# EAGLE board SoilCape (EAGLE 7.2.0)
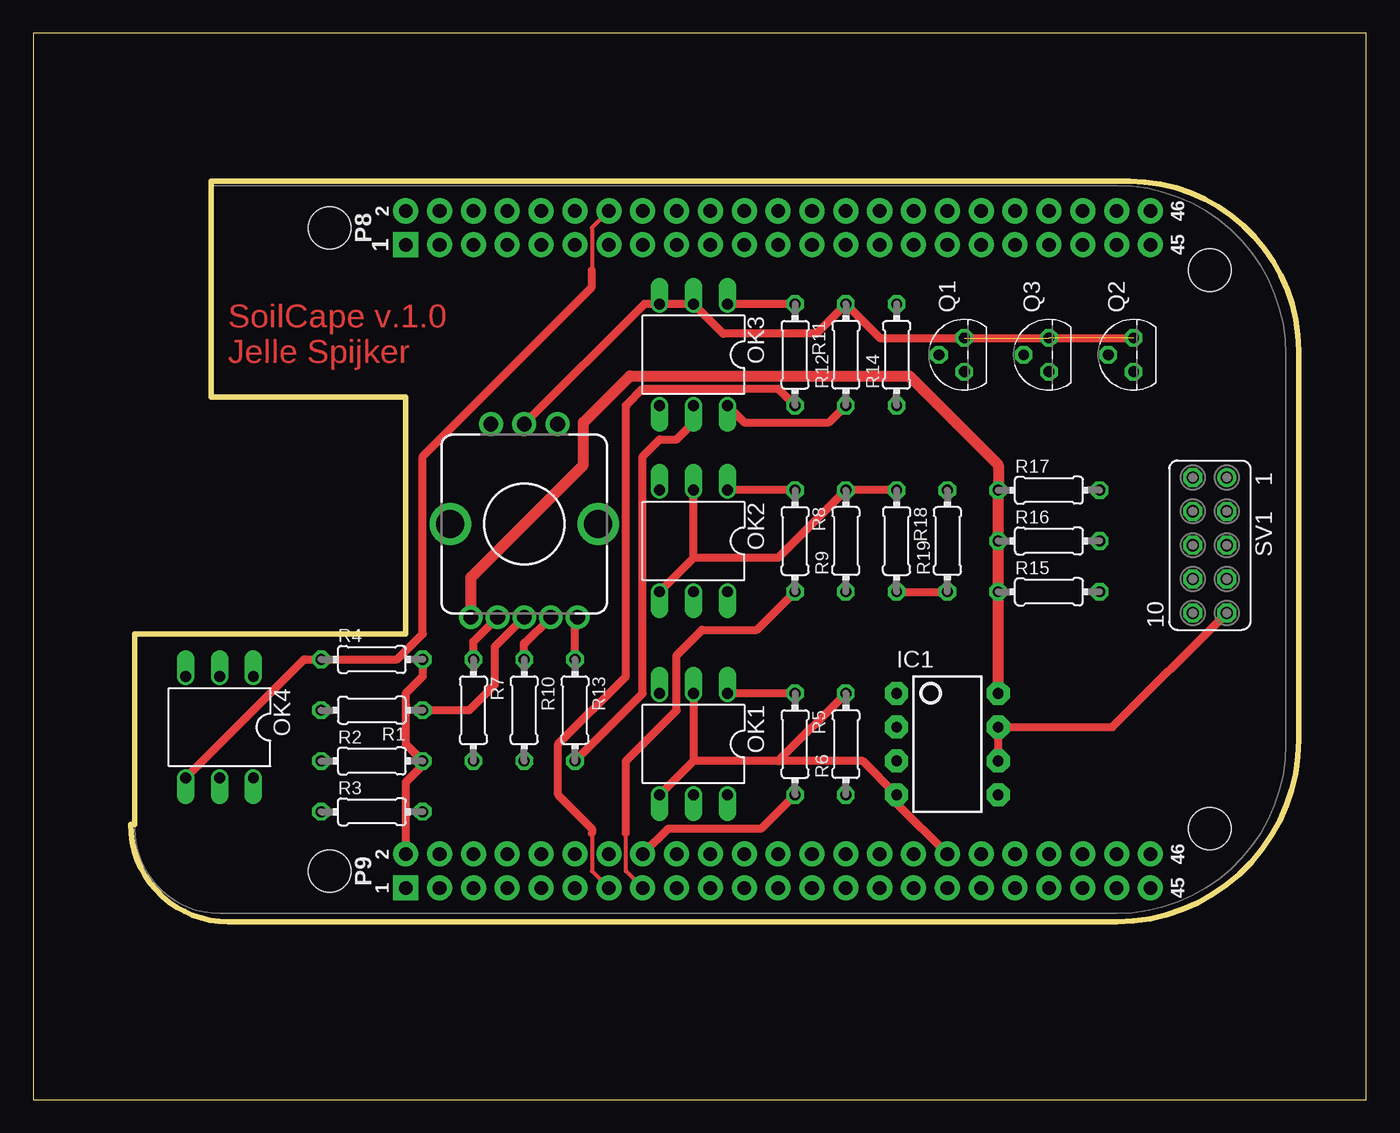
[diagram p0: board, top side]
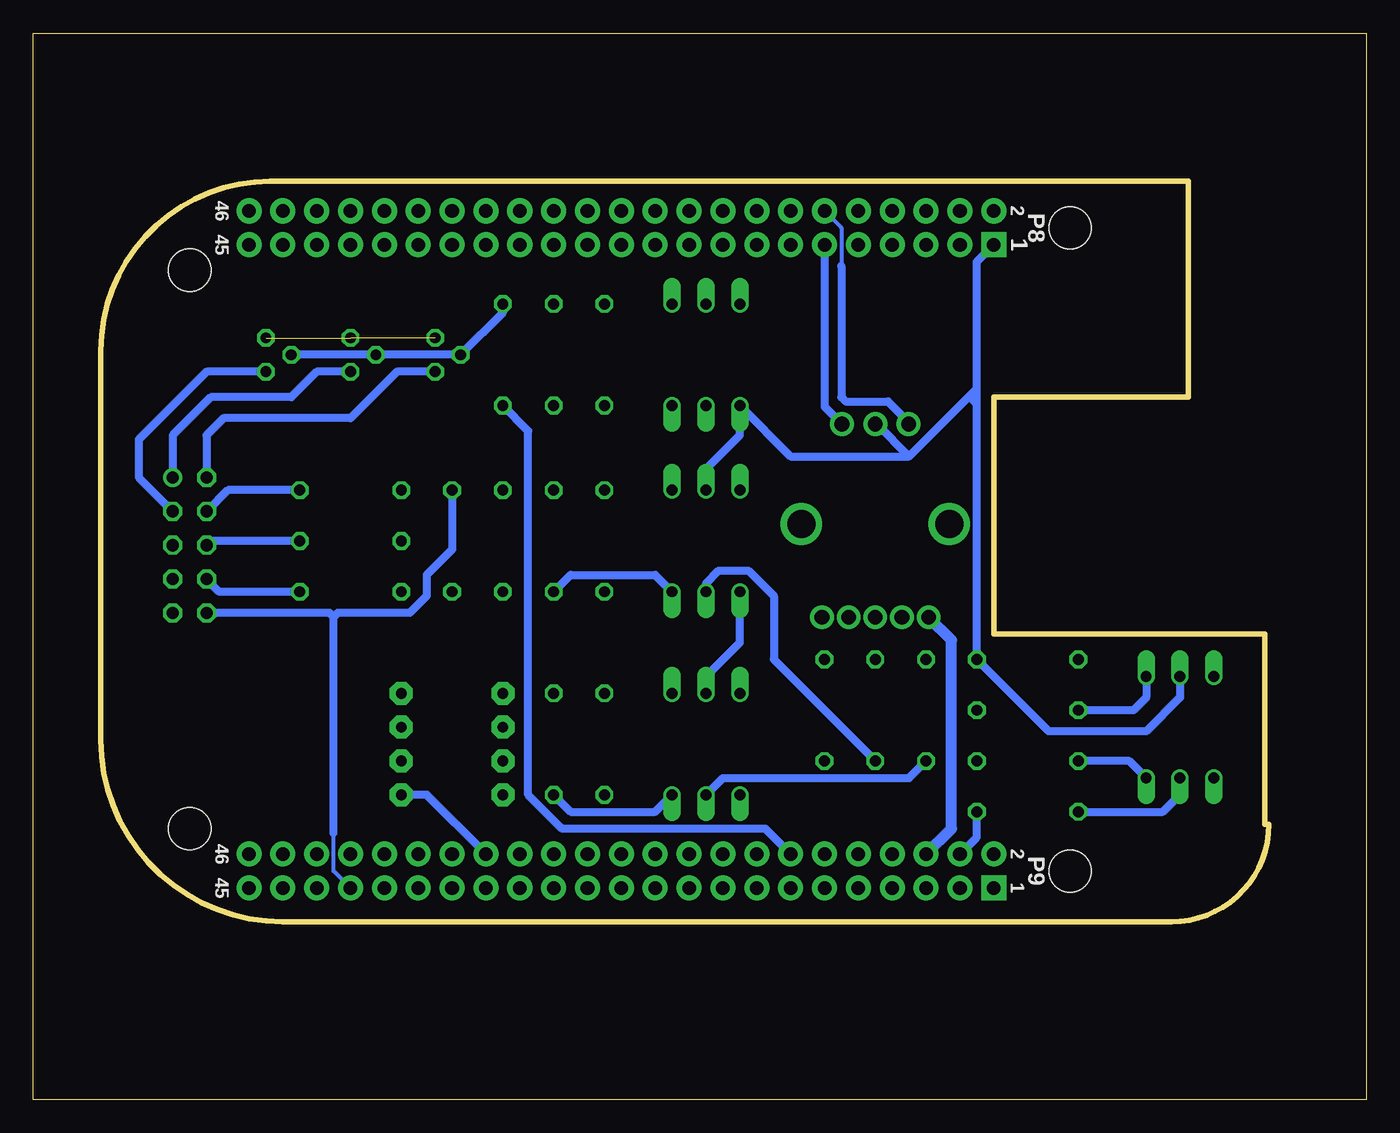
[diagram p1: board, bottom side, seen from below]

Size 100 x 80 mm. Coordinates in mm from the lower left corner, seen from the top.
Outline: 0,0 100,0 100,80 0,80 0,0
Outline: 7.62,34.92 27.94,34.92 27.94,52.7 13.34,52.7 13.34,68.9 82.23,68.9 arc-90 94.93,56.2 94.93,26.99 arc-90 81.28,13.34 14.61,13.34 arc-90 7.3,20.64 7.62,20.64 7.62,34.92
Copper layers (1*16): Top 0.035mm / dielectric 1.5mm / Bottom 0.035mm
Design rules "default": minimum track width 10mil, minimum drill 24mil, track to track 8mil, track to pad 8mil, pad to pad 8mil, via to via 8mil, smd to smd 8mil, copper to edge 40mil, drill to drill 8mil, minimum pad ring 10mil, minimum via ring 8mil, stop-mask expansion 4mil, vias tented up to drill 0mil, thermal gap 10mil

## Footprints (pad centres in the part's own frame; a part is rotated, then mirrored left to right if it is on the bottom)
DIP08 = drill 0.813 pad 1.727 octagon: 1 -3.81,-3.81; 2 -1.27,-3.81; 3 1.27,-3.81; 4 3.81,-3.81; 5 3.81,3.81; 6 1.27,3.81; 7 -1.27,3.81; 8 -3.81,3.81
DIL06 = drill 0.813 offset: 1 -2.54,-3.81; 2 0,-3.81; 3 2.54,-3.81; 4 2.54,3.81; 5 0,3.81; 6 -2.54,3.81
TO92 = drill 0.813 octagon: 1 1.27,0; 2 0,1.905; 3 -1.27,0
0204/7 = drill 0.813 octagon: 1 -3.81,0; 2 3.81,0
FE05-2 = drill 0.914: 1 -5.08,1.27 | drill 0.914 octagon: 2 -5.08,-1.27; 3 -2.54,1.27; 4 -2.54,-1.27; 5 0,1.27; 6 0,-1.27; 7 2.54,1.27; 8 2.54,-1.27; 9 5.08,1.27; 10 5.08,-1.27
ENCODER_LED_3 = drill 1.1 pad 1.778: 1 -4,7; 2 -2,7; 3 0,7; 4 2,7; 5 4,7 | drill 1.1 pad 1.8: A -2.5,-7.5; B 2.5,-7.5; C 0,-7.5 | drill 2.1: M1 -5.55,0; M2 5.55,0
BEAGLE_BONE_BLACK_CAPE = drill 1.016 pad 1.88 square: P8.1 20.32,50.165; P9.1 20.32,1.905 | drill 1.016 pad 1.88: P8.2 20.32,52.705; P8.3 22.86,50.165; P8.4 22.86,52.705; P8.5 25.4,50.165; P8.6 25.4,52.705; P8.7 27.94,50.165; P8.8 27.94,52.705; P8.9 30.48,50.165; P8.10 30.48,52.705; P8.11 33.02,50.165; P8.12 33.02,52.705; P8.13 35.56,50.165; P8.14 35.56,52.705; P8.15 38.1,50.165; P8.16 38.1,52.705; P8.17 40.64,50.165; P8.18 40.64,52.705; P8.19 43.18,50.165; P8.20 43.18,52.705; P8.21 45.72,50.165; P8.22 45.72,52.705; P8.23 48.26,50.165; P8.24 48.26,52.705; P8.25 50.8,50.165; P8.26 50.8,52.705; P8.27 53.34,50.165; P8.28 53.34,52.705; P8.29 55.88,50.165; P8.30 55.88,52.705; P8.31 58.42,50.165; P8.32 58.42,52.705; P8.33 60.96,50.165; P8.34 60.96,52.705; P8.35 63.5,50.165; P8.36 63.5,52.705; P8.37 66.04,50.165; P8.38 66.04,52.705; P8.39 68.58,50.165; P8.40 68.58,52.705; P8.41 71.12,50.165; P8.42 71.12,52.705; P8.43 73.66,50.165; P8.44 73.66,52.705; P8.45 76.2,50.165; P8.46 76.2,52.705; P9.2 20.32,4.445; P9.3 22.86,1.905; P9.4 22.86,4.445; P9.5 25.4,1.905; P9.6 25.4,4.445; P9.7 27.94,1.905; P9.8 27.94,4.445; P9.9 30.48,1.905; P9.10 30.48,4.445; P9.11 33.02,1.905; P9.12 33.02,4.445; P9.13 35.56,1.905; P9.14 35.56,4.445; P9.15 38.1,1.905; P9.16 38.1,4.445; P9.17 40.64,1.905; P9.18 40.64,4.445; P9.19 43.18,1.905; P9.20 43.18,4.445; P9.21 45.72,1.905; P9.22 45.72,4.445; P9.23 48.26,1.905; P9.24 48.26,4.445; P9.25 50.8,1.905; P9.26 50.8,4.445; P9.27 53.34,1.905; P9.28 53.34,4.445; P9.29 55.88,1.905; P9.30 55.88,4.445; P9.31 58.42,1.905; P9.32 58.42,4.445; P9.33 60.96,1.905; P9.34 60.96,4.445; P9.35 63.5,1.905; P9.36 63.5,4.445; P9.37 66.04,1.905; P9.38 66.04,4.445; P9.39 68.58,1.905; P9.40 68.58,4.445; P9.41 71.12,1.905; P9.42 71.12,4.445; P9.43 73.66,1.905; P9.44 73.66,4.445; P9.45 76.2,1.905; P9.46 76.2,4.445 | hole 3.175: 14.605,3.175; 80.645,6.35; 80.645,48.26; 14.605,51.435

## Placement (x,y rotation side)
IC1  LM358  [DIP08]  68.58,26.67 270 top
OK1  4N25M  [DIL06]  49.53,26.67 180 top
OK2  4N25M  [DIL06]  49.53,41.91 180 top
OK3  4N25M  [DIL06]  49.53,55.88 180 top
OK4  4N25M  [DIL06]  13.97,27.94 180 top
Q1  BC547B  [TO92]  69.85,55.88 90 top
Q2  BC547B  [TO92]  82.55,55.88 90 top
Q3  BC547B  [TO92]  76.2,55.88 90 top
R1  [0204/7]  25.4,29.21 180 top
R2  [0204/7]  25.4,25.4 0 top
R3  [0204/7]  25.4,21.59 0 top
R4  [0204/7]  25.4,33.02 0 top
R5  [0204/7]  57.15,26.67 270 top
R6  [0204/7]  60.96,26.67 90 top
R7  [0204/7]  33.02,29.21 270 top
R8  [0204/7]  57.15,41.91 270 top
R9  [0204/7]  60.96,41.91 90 top
R10  [0204/7]  36.83,29.21 270 top
R11  [0204/7]  57.15,55.88 270 top
R12  [0204/7]  60.96,55.88 90 top
R13  [0204/7]  40.64,29.21 270 top
R14  [0204/7]  64.77,55.88 90 top
R15  [0204/7]  76.2,38.1 0 top
R16  [0204/7]  76.2,41.91 0 top
R17  [0204/7]  76.2,45.72 0 top
R18  [0204/7]  64.77,41.91 270 top
R19  [0204/7]  68.58,41.91 90 top
SV1  [FE05-2]  88.27,41.59 270 top
SW1  [ENCODER_LED_3]  36.83,43.18 180 top
U$1  BEAGLE_BONE_BLACK_CAPE  [BEAGLE_BONE_BLACK_CAPE]  7.62,13.97 0 top

## Library data of the parts
IC1 = SparkFun-AnalogIC; PROD_ID: IC-09172
OK1-OK4 = optocoupler; MPN: 4N25-M; OC_FARNELL: 1021349; OC_NEWARK: 98K9084
Q1-Q3 = transistor-npn
R1-R19 = resistor
SV1 = con-lsta; OC_FARNELL: unknown; OC_NEWARK: unknown
SW1 = SparkFun-Electromechanical
U$1 = SparkFun-Boards

## Nets
ENC_A: SW1.A U$1.P8.11
ENC_B: SW1.B U$1.P8.12
GND: IC1.4 OK1.2 OK1.4 OK2.2 OK2.4 OK3.2 OK3.4 OK4.2 Q1.1 Q2.1 Q3.1 R2.2 R4.2 R6.2 R9.2 R12.2 R18.1 SW1.C U$1.P8.1 U$1.P9.2 U$1.P9.34
GPIO_26: OK4.4 R4.1 U$1.P8.14
GPIO_51: R5.2 U$1.P9.16
N$1: OK4.5 R3.1
N$2: OK4.6 R2.1
N$3: OK1.1 R5.1
N$4: OK3.1 R11.1
N$5: OK4.1 R1.2
N$6: R1.1 SW1.3
N$7: OK2.1 R8.1
N$8: OK2.5 R10.2
N$9: R10.1 SW1.2
N$10: R13.1 SW1.1
N$11: OK1.6 R6.1
N$12: OK3.5 R13.2
N$13: OK3.6 R12.1
N$14: R7.1 SW1.4
N$15: OK1.5 R7.2
N$16: OK2.6 R9.1
N$17: IC1.8 R15.1 R16.1 R17.1 SW1.5 U$1.P9.6
N$18: R8.2 U$1.P9.15
N$19: R11.2 U$1.P9.13
N$20: R14.1 U$1.P9.14
N$21: Q1.2 Q2.2 Q3.2 R14.2
N$22: Q2.3 SV1.3
N$23: R15.2 SV1.8
N$24: Q3.3 SV1.1
N$26: R16.2 SV1.6
N$28: R18.2 R19.1
N$29: IC1.6 IC1.7 SV1.9
N$30: IC1.5 U$1.P9.32
N$31: R19.2 SV1.10 U$1.P9.39
N$36: R17.2 SV1.4
N$37: Q1.3 SV1.2
VDD_3V3: R3.2 U$1.P9.4

## Tracks (layer width: path | path; a pad name or v marks a point on that pad's centre or on a via)
ENC_A
  Bottom 0.61: U$1.P8.11 40.64,51.99 SW1.A
ENC_B
  Bottom 0.305: U$1.P8.12 39.37,65.41 39.37,62.55
  Bottom 0.61: SW1.B 34.33,50.84 35.88,52.39 39.05,52.39 39.37,52.7 39.37,62.55
GND  (2 unrouted)
  Top 0.61: OK1.2 49.53,25.4 | 49.53,25.4 OK1.4 | R6.2 55.88,25.4 | 55.88,25.4 49.53,25.4 | 55.88,25.4 62.23,25.4 IC1.4 64.77,22.23 U$1.P9.34 | Q2.1 63.5,57.15 R12.2 58.74,57.47 51.75,57.47 OK3.2 45.84,59.69 SW1.C | OK2.4 49.53,40.64 | 49.53,40.64 OK2.2 | R18.1 R9.2 55.88,40.64 49.53,40.64 | R4.2 29.21,31.75 27.94,30.48 27.94,26.67 R2.2 29.21,25.08 27.94,23.81 U$1.P9.2
  Bottom 0.406: 29.84,52.7 29.21,52.07
  Bottom 0.61: SW1.C 36.71,50.68 34.29,48.26 | 34.29,48.26 29.84,52.7 29.21,53.34 | 29.21,53.34 29.21,52.07 R4.2 23.81,27.62 16.51,27.62 13.97,30.16 OK4.2 | 29.21,53.34 29.21,62.87 U$1.P8.1 | 34.29,48.26 43.18,48.26 OK3.4 46.99,49.85 49.53,47.31 OK2.2 | OK1.2 49.53,31.75 46.99,34.29 OK2.4
GPIO_26
  Top 0.305: U$1.P8.14 41.91,65.41 41.91,62.23
  Top 0.61: OK4.4 20.32,33.02 R4.1 27.3,33.02 29.21,34.92 29.21,48.26 41.91,60.96 41.91,62.23
GPIO_51
  Top 0.61: R5.2 54.61,20.32 47.62,20.32 U$1.P9.16
N$1
  Bottom 0.61: R3.1 15.24,21.59 13.97,22.86 OK4.5
N$2
  Bottom 0.61: OK4.6 17.78,25.4 R2.1
N$3
  Top 0.61: R5.1 OK1.1
N$4
  Top 0.61: R11.1 OK3.1
N$5
  Bottom 0.61: OK4.1 16.51,30.16 17.46,29.21 R1.2
N$6
  Top 0.61: SW1.3 36.81,36.18 34.61,33.97 34.61,31.11 32.7,29.21 R1.1
N$7
  Top 0.61: R8.1 OK2.1
N$8
  Bottom 0.61: OK2.5 49.53,38.73 48.58,39.69 46.35,39.69 44.45,37.78 44.45,33.02 R10.2
N$9
  Top 0.61: R10.1 36.83,34.29 36.94,34.29 SW1.2
N$10
  Top 0.61: R13.1 40.64,35.99 SW1.1
N$11
  Bottom 0.61: R6.1 59.69,21.59 53.34,21.59 OK1.6
N$12
  Top 0.61: R13.2 45.72,30.48 45.72,48.26 46.99,49.53 48.26,49.53 49.53,50.8 OK3.5
N$13
  Top 0.61: OK3.6 53.34,50.8 59.69,50.8 R12.1
N$14
  Top 0.61: R7.1 33.02,34.37 SW1.4
N$15
  Bottom 0.61: OK1.5 48.26,24.13 34.29,24.13 R7.2
N$16
  Bottom 0.61: R9.1 59.69,39.37 53.34,39.37 OK2.6
N$17
  Top 0.254: 72.47,45.72 R17.1
  Top 0.813: IC1.8 R15.1 R16.1 R17.1 72.39,47.62 65.72,54.29 44.77,54.29 41.27,50.8 41.27,47.62 32.83,39.18 SW1.5
  Bottom 0.813: U$1.P9.6 31.11,20.32 31.11,34.47 SW1.5
N$18
  Top 0.305: U$1.P9.15 44.45,17.14 44.45,20
  Top 0.61: 44.45,20 44.45,25.4 48.26,29.21 48.26,33.34 50.16,35.24 54.29,35.24 R8.2
N$19
  Top 0.305: U$1.P9.13 41.91,17.14 41.91,20
  Top 0.61: R11.2 55.88,53.34 45.72,53.34 44.45,52.07 44.45,31.75 39.37,26.67 39.37,22.86 41.91,20.32 41.91,20
N$20
  Bottom 0.61: U$1.P9.14 45.09,20.32 60.33,20.32 62.87,22.86 62.87,50.16 R14.1
N$21
  Bottom 0.61: R14.2 64.77,59.05 Q1.2 Q3.2 Q2.2
N$22
  Bottom 0.61: Q2.3 87,54.61 92.08,49.53 92.08,46.67 SV1.3
N$23
  Bottom 0.61: R15.2 86.04,38.1 SV1.8
N$24
  Bottom 0.61: Q3.3 78.74,54.61 80.64,52.7 86.68,52.7 89.53,49.85 SV1.1
N$26
  Bottom 0.61: R16.2 86.68,41.91 SV1.6
N$28
  Top 0.254: 64.92,38.18 R18.2 | 68.58,38.18 R19.1
  Top 0.61: 64.92,38.18 64.85,38.1 R18.2 R19.1
N$29
  Top 0.61: IC1.6 IC1.7 80.96,27.94 SV1.9
N$30
  Bottom 0.61: U$1.P9.32 70.48,22.86 IC1.5
N$31
  Bottom 0.305: U$1.P9.39 77.47,17.14 77.47,20
  Bottom 0.61: 77.47,20 77.47,36.2 | 77.47,36.2 77.79,36.51 SV1.10 | R19.2 68.58,41.27 70.48,39.37 70.48,37.78 71.75,36.51 77.15,36.51 77.47,36.2
N$36
  Bottom 0.61: R17.2 85.41,45.72 SV1.4
N$37
  Bottom 0.61: Q1.3 72.71,54.61 76.2,51.12 85.72,51.12 87,49.85 SV1.2
VDD_3V3
  Bottom 0.61: U$1.P9.4 29.21,19.68 R3.2

## Text on the board
Top: SoilCape v.1.0 / Jelle Spijker